# Altium PCB ppm_subs.PcbDoc
Units mil, origin at the board's own origin, x right, y up, seen from the top; angles counter-clockwise.
Board outline 813.03 x 1058.03 mil, 2 copper layers (Top Layer, Bottom Layer); 24 components, 31 nets, 125 pads, 19 vias.
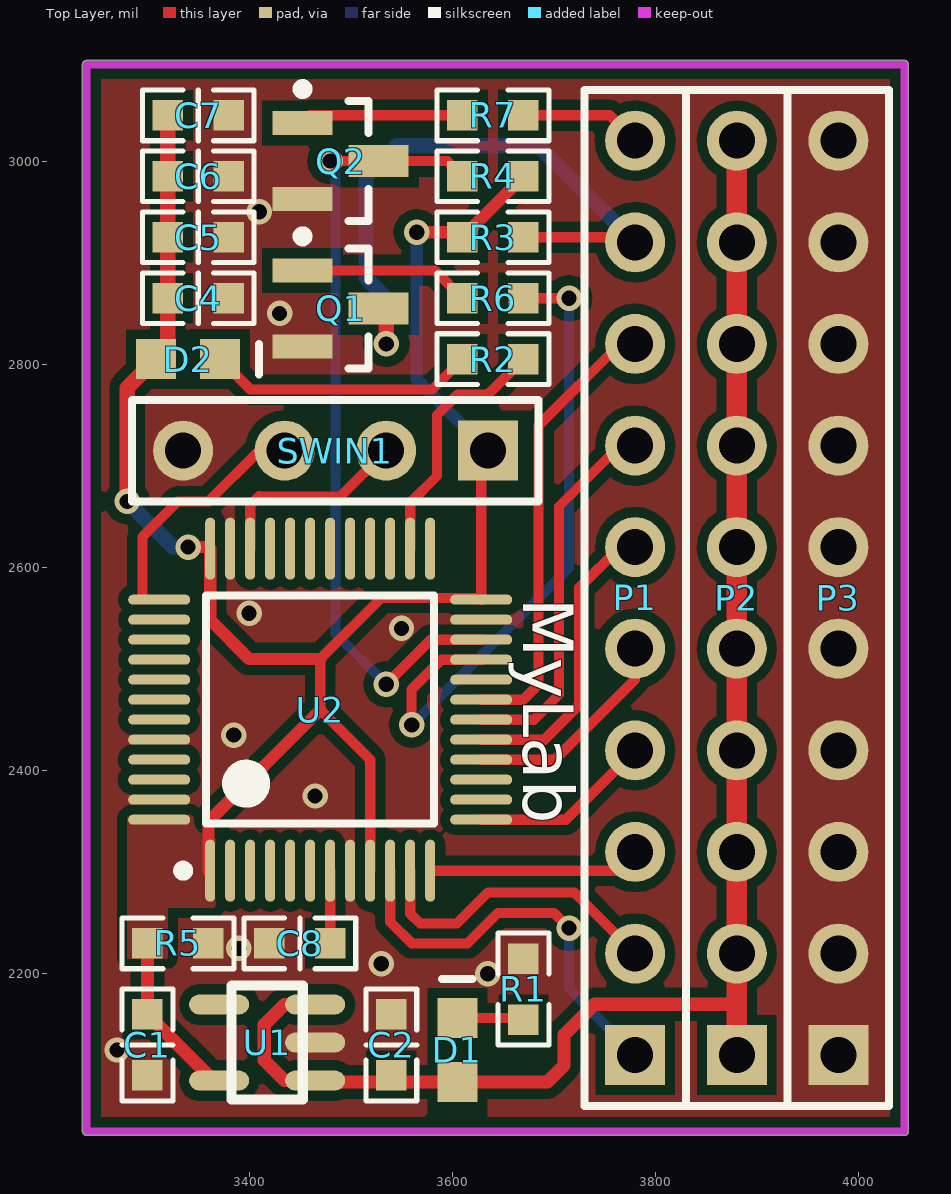
[diagram p0: Top Layer view]
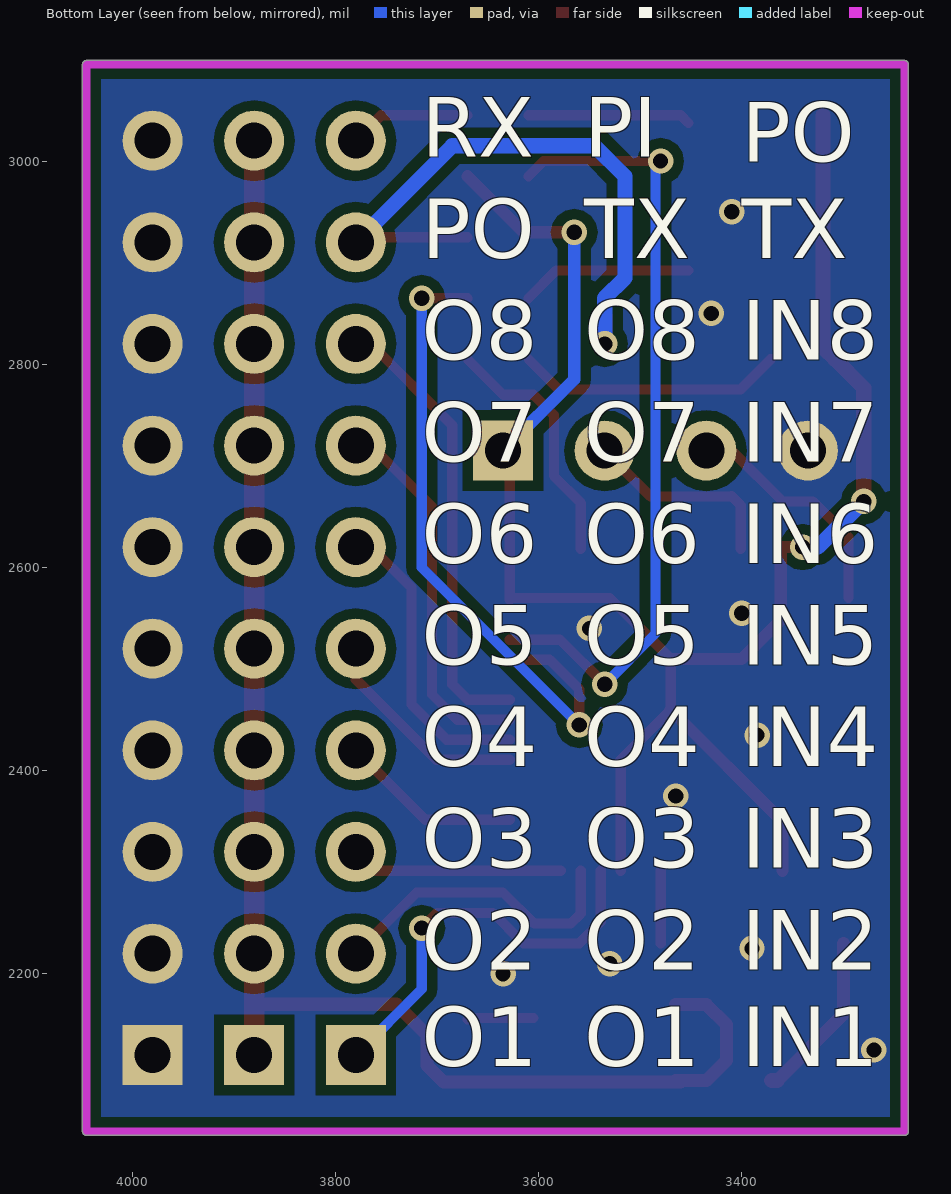
[diagram p1: Bottom Layer view, seen from below]

## Layer stack, top to bottom
Top Layer: signal copper 1.4
Dielectric: dielectric 12.6, FR-4, Dk 4.8
Bottom Layer: signal copper 1.4

## Board outline
3235.99,2045 ccw(c3240,2045) 3240,2040.98 4045,2040.98 ccw(c4045,2045) 4049.01,2045 4049.01,3095 ccw(c4045,3095) 4045,3099.01 3240,3099.01 ccw(c3240,3095) 3235.99,3095

## Design rules (kind name [scope] priority, off if disabled: settings)
Clearance [All] p1: gap=10
ComponentClearance [All] p1 off: gap=10 collisioncheckmode=3 verticalgap=10 showdistances=FALSE
Height [All] p1 off: minheight=0 maxheight=1000 prefheight=500
HoleSize [All] p1 off: absolutevalues=TRUE maxlimit=100 minlimit=1 maxpercent=80.000 minpercent=20.000
HoleToHoleClearance [All] p1 off: gap=10 allowstackedmicrovias=FALSE
LayerPairs [All] p1 off: enforce=TRUE
MinimumSolderMaskSliver [All] p1 off: minsoldermaskwidth=10
NetAntennae [All] p1 off: netantennaetolerance=0
PlaneConnect [All] p1: planeconnectstyle=Direct reliefexpansion=20 reliefentries=4 reliefconductorwidth=10 reliefairgap=10
PolygonConnect [All] p1: connectstyle=Direct reliefconductorwidth=10 reliefentries=4 polygonreliefangle="90 Angle"
RoutingCorners [All] p1: cornerstyle=Round minsetback=100 maxsetback=100
RoutingVias [All] p1: holewidth=25 width=25 viastyle="Through Hole" minholewidth=15 minwidth=25 maxholewidth=50 maxwidth=200
SilkToSilkClearance [All] p1 off: silktosilkclearance=10
SilkscreenOverComponentPads SilkToSolderMaskClearance [IsPad] p1 off: minsilkscreentomaskgap=10
SolderMaskExpansion [All] p1: expansion=4
TestPointUsage FabricationTestPointUsage [All] p1: valid=0 allowmultiple=FALSE
Testpoint FabricationTestpoint [All] p1: side=3 testpointundercomponent=TRUE minsize=40 maxsize=100 preferedsize=60 minholesize=0 maxholesize=40 preferedholesize=32 testpointgrid=1 style=297 order=0123456789
Width [All] p1: maxlimit=100 minlimit=8 preferedwidth=8
13 further rules are at their usual default settings.

## Components (designator, comment, footprint, x,y, rotation, side; value= is the part's Value field where it differs from the comment)
C1 "0.1uF" c_0603 3300,2130 r270 top
C2 "0.1uF" c_0603 3540,2130 r90 top
C4 "0.1uF" c_0603 3350,2865 r0 top
C5 "0.1uF" c_0603 3350,2925 r0 top
C6 "0.1uF" c_0603 3350,2985 r0 top
C7 "0.1uF" c_0603 3350,3045 r0 top
C8 "0.1uF" c_0603 3450,2230 r0 top
D1 "LED Gr" LED0603 3605,2125 r270 top
D2 "LED Gr" LED0603 3340,2805 r180 top
P1 "Header 10" HDR1X10 3780,2120 r90 top
P2 "Header 10" HDR1X10 3880,2120 r90 top
P3 "Header 10" HDR1X10 3980,2120 r90 top
Q1 "BSS123" SOT23-3N 3490,2855 r0 top
Q2 "BSS123" SOT23-3N 3490,3000 r0 top
R1 "1K" R_0603 3670,2185 r270 top
R2 "1K" R_0603 3640,2805 r180 top
R3 "1K" R_0603 3640,2925 r180 top
R4 "1K" R_0603 3640,2985 r0 top
R5 "1K" R_0603 3330,2230 r0 top
R6 "100R" R_0603 3640,2865 r180 top
R7 "100R" R_0603 3640,3045 r180 top
SWIN1 "Pad1X4_1.27_SWD" HDR1X4 3635,2715 r180 top
U1 "SPX3819M5" SOT-23-5 3465,2095 r180 top
U2 "STM32F103C8T6" LQFP48_L 3470,2460 r90 top

## Footprints (in the part's own frame and the unit in brackets; to place one, negate y for a bottom-side part, rotate by r counter-clockwise, add the part's x,y. Pads: shape width x height; smd on the part's side, far side on the other; paste and mask are expansions set on the pad)
c_0603 [mil]
  rect 30x30 smd: 1(-30,0) 2(30,0)
  silkscreen extent -55,-25 55,25
HDR1X4 [mm] "Connector; Header; 4 Position"
  rect 1.5x1.5 hole 0.9: 1(0,0)
  round 1.5 hole 0.9: 2(2.54,0) 3(5.08,0) 4(7.62,0)
  silkscreen extent -1.27,-1.27 8.89,1.27
HDR1X10 [mm] "Connector; Header; 10 Position"
  rect 1.5x1.5 hole 0.9: 1(0,0)
  round 1.5 hole 0.9: 2(2.54,0) 3(5.08,0) 4(7.62,0) 5(10.16,0) 6(12.7,0) 7(15.24,0) 8(17.78,0) 9(20.32,0) 10(22.86,0)
  silkscreen extent -1.27,-1.27 24.13,1.27
LED0603 [mm] "Chip LED, Body 1.6x0.8mm, IPC Medium Density"
  rect 1x1 smd: 1(-0.8,0) 2(0.8,0)
  silkscreen extent -1.78,-0.38 -1.78,0.38, body extent -0.82,-0.38 0.82,0.34, height 0.68
LQFP48_L [mm]
  oval 1.55x0.25 smd: 1(-4.025,2.75) 2(-4.025,2.25) 3(-4.025,1.75) 4(-4.025,1.25) 5(-4.025,0.75) 6(-4.025,0.25) 7(-4.025,-0.25) 8(-4.025,-0.75) 9(-4.025,-1.25) 10(-4.025,-1.75) 11(-4.025,-2.25) 12(-4.025,-2.75) 25(4.025,-2.75) 26(4.025,-2.25) 27(4.025,-1.75) 28(4.025,-1.25) 29(4.025,-0.75) 30(4.025,-0.25) 31(4.025,0.25) 32(4.025,0.75) 33(4.025,1.25) 34(4.025,1.75) 35(4.025,2.25) 36(4.025,2.75)
  oval 0.25x1.55 smd: 13(-2.75,-4.025) 14(-2.25,-4.025) 15(-1.75,-4.025) 16(-1.25,-4.025) 17(-0.75,-4.025) 18(-0.25,-4.025) 19(0.25,-4.025) 20(0.75,-4.025) 21(1.25,-4.025) 22(1.75,-4.025) 23(2.25,-4.025) 24(2.75,-4.025) 37(2.75,4.025) 38(2.25,4.025) 39(1.75,4.025) 40(1.25,4.025) 41(0.75,4.025) 42(0.25,4.025) 43(-0.25,4.025) 44(-0.75,4.025) 45(-1.25,4.025) 46(-1.75,4.025) 47(-2.25,4.025) 48(-2.75,4.025)
  silkscreen extent -4.15,-2.85 2.85,3.55
R_0603 [mil]
  rect 30x30 smd: 1(-30,0) 2(30,0)
  silkscreen extent -55,-25 55,25
SOT23-3N [mm] "SOT23, 3-Leads, Body 2.9x1.3mm, Pitch 0.95mm, Lead Span 2.5mm, IPC Medium Density"
  rect 1.5x0.6 smd: 1(-0.95,0.95) 2(-0.95,-0.95)
  rect 1.5x0.8 smd: 3(0.95,0)
  silkscreen extent -1.07,-1.5 0.7,1.92, body extent -1.21,-1.45 1.21,1.45, height 0.99
SOT-23-5 [mm]
  oval 1.5x0.5 smd: 1(0,0) 2(0,-0.95) 3(0,-1.9) 4(2.4,-1.9) 5(2.4,0)
  silkscreen extent 0.31,-2.38 2.09,0.48, body extent -0.2,-2.4 2.6,0.5, height 1.2

## Part data
C1 C2 C4 C5 C6 C7 C8: library part CAP, "Capacitor"
D1 D2: "Green"
P1 P2 P3: "Header, 10-Pin"
Q1 Q2: library part 2N7002, "N-channel Enhancement Mode Field-effect Transistor"
R1 R2 R3 R4 R5 R6 R7: library part Res, "Resistor"
SWIN1: "Header"
U1: "3.3V 500mA LDO Regulator"
U2: "STM32 ARM-based 32-bit MCU with 64 Kbytes Flash, 48-pin LQFP, Industrial Temperature"

## Via types
v1: diameter 25, hole 15, Top Layer to Bottom Layer, 19 vias

## Nets (pads, with @x,y where several pads share a name; then routed paths per layer and width w, separated by ;. In a path a pad name is that pad's centre, name@x,y a point inside that pad or via, vN(x,y) a via of type N, cw(c..) or ccw(c..) an arc to the next point about the centre after c; other vN are vias at no path point)
3V3: C1.1 C4.1 C5.1 C6.1 C7.1 D2.2 R3.2 R4.2 R5.1 SWIN1.1 U1.5 U2.1 U2.9 U2.24 U2.36 U2.48 | length 1986
  Top Layer w10: U2.9 3519.21,2410.79 3470,2460 3470,2510 3530,2570 3626.73,2570 U2.24 SWIN1.1@3628.46,2708.46
  Top Layer w12: v1(3340,2620) U2.36@3360.2,2620 ; U2.1@3360,2301.54 3360,2350 3470,2460 ; U2.36 3361.73,2548.27 3400,2510 3470,2510 ; v1(3565,2930) 3615,2930 R4.2
  Top Layer w13: R5.1 C1.1 U1.5@3365,2095
  Top Layer w15: v1(3280,2665) 3280,2776.5 D2.2 3320,2816.5 C4.1 C5.1 C6.1 C7.1 ; U1.5@3365,2095 U1.5
  Bottom Layer w12: v1(3565,2930) 3565,2785 SWIN1.1
  Bottom Layer w15: v1(3280,2665) 3325,2620 v1(3340,2620)
5V: C2.1 D1.2 P2.1 P2.2 P2.3 P2.4 P2.5 P2.6 P2.7 P2.8 P2.9 P2.10 U1.1 U1.3 | length 1520.7
  Top Layer w13: U1.1@3460,2093.5 D1.2 3693.5,2093.5 3710,2110 3710,2140 3740,2170 3880,2170 ; U1.1 3435,2095 3415,2115 3415,2150 3434.8,2169.8 U1.3
  Top Layer w20: P2.1 3880,2170 P2.2 P2.3 P2.4 P2.5 P2.6 P2.7 P2.8 P2.9 P2.10
GND: C1.2 C2.2 C4.2 C5.2 C6.2 C7.2 C8.1 P3.1 P3.2 P3.3 P3.4 P3.5 P3.6 P3.7 P3.8 P3.9 P3.10 Q1.2 Q2.2 R1.1 R5.2 SWIN1.4 U1.2 U2.8 U2.23 U2.35 U2.44 U2.47
  other v1: 3270,2125 3635,2200 3530,2210 3390,2225 3465,2375 3385,2435 3550,2540 3400,2555 3430,2850 3410,2950
JTCK: SWIN1.3 U2.37 | length 235.2
  Top Layer w10: U2.37@3295,2570 3295,2630 3330,2665 3360,2665 3410,2715 SWIN1.3
JTMS: SWIN1.2 U2.34 | length 198.9
  Top Layer w10: U2.34 3401.1,2661.1 3410,2670 ; 3410,2669.88 3490,2669.88 ; 3490,2670 SWIN1.2
LED: R2.1 U2.26 | length 250.3
  Top Layer w10: U2.26 3558.58,2663.58 3585,2690 3585,2750 3605,2770 3635,2770 R2.1
NetC8_2: C8.2 U2.7 | length 71.4
  Top Layer w10: C8.2@3479.84,2230.16 U2.7
NetD1_1: D1.1 R1.2 | length 65.6
  Top Layer w10: D1.1 3668.5,2156.5 R1.2
NetD2_1: D2.1 R2.2 | length 263.4
  Top Layer w10: D2.1 3401.5,2775 3580,2775 R2.2
NetQ1_1: Q1.1 R6.2 | length 168.8
  Top Layer w10: Q1.1 3582.6,2892.4 R6.2
NetQ2_1: Q2.1 R7.2 | length 160.5
  Top Layer w10: Q2.1 3460.2,3045 R7.2
SBUS_RX: P1.9 Q1.3 R3.1 | length 629.5
  Top Layer w10: R3.1 3775,2925 P1.9
  Top Layer w15: v1(3535,2820) Q1.3@3535,2847.4
  Bottom Layer w15: v1(3535,2820) 3535,2865 3515,2885 3515,2985 3545,3015 3685,3015 P1.9
SBUS_TX: P1.10 R7.1 | length 120.4
  Top Layer w10: R7.1 3755,3045 P1.10
TIM1_CH1: U2.29
TIM1_CH2: U2.30
TIM1_CH3: U2.31
TIM1_CH4: U2.32
TIM2_CH1: P1.1 U2.10 | length 405.8
  Top Layer w10: U2.10 3538.9,2251.1 3560,2230 3615,2230 3645,2260 3700,2260 v1(3715,2245)
  Bottom Layer w10: v1(3715,2245) 3715,2185 P1.1
TIM2_CH2: P1.2 U2.11 | length 305.1
  Top Layer w10: U2.11 3558.58,2259.26 3568.15,2249.68 3604.68,2249.68 3635,2280 3720,2280 P1.2
TIM2_CH3: P1.3 U2.12 | length 209.4
  Top Layer w10: U2.12 3761.54,2301.54 P1.3
TIM2_CH4: P1.4 U2.13 | length 179.8
  Top Layer w10: U2.13 3711.73,2351.73 P1.4
TIM3_CH1: P1.5 U2.16 | length 214.3
  Top Layer w10: U2.16 3700.79,2410.79 3780,2490 P1.5
TIM3_CH2: P1.6 U2.17 | length 282.4
  Top Layer w10: U2.17 3690.47,2430.47 3725,2465 3725,2580 P1.6@3765,2620
TIM3_CH3: P1.7 U2.18 | length 356.7
  Top Layer w10: U2.18 3680.16,2450.16 3705,2475 3705,2660 P1.7@3765,2720
TIM3_CH4: P1.8 U2.19 | length 430.9
  Top Layer w10: U2.19 3669.84,2469.84 3685,2485 3685,2740 P1.8@3765,2820
TIM4_CH1: U2.42
TIM4_CH2: U2.43
TIM4_CH3: U2.45
TIM4_CH4: U2.46
USART3_RX: Q2.3 R4.1 U2.22 | length 785.6
  Top Layer w10: v1(3480,3000) Q2.3 3595,3000 R4.1 ; v1(3535,2485) 3578.9,2528.9 U2.22
  Bottom Layer w10: v1(3480,3000) 3485,2995 3485,2535 v1(3535,2485)
USART3_TX: R6.1 U2.21 | length 644.8
  Top Layer w10: v1(3560,2445) 3560,2480 3589.21,2509.21 U2.21 ; R6.1 v1(3715,2865)
  Bottom Layer w10: v1(3560,2445) 3715,2600 v1(3715,2865)
pads on no net: U1.4 U2.2 U2.3 U2.4 U2.5 U2.6 U2.14 U2.15 U2.20 U2.25 U2.27 U2.28 U2.33 U2.38 U2.39 U2.40 U2.41

## Polygon pours and split planes (outlines as drawn)
GND on Top Layer "Top Layer-No Net" (solid, remove dead copper, pour order 1001): 3240,3095 4045,3095 4045,2045 3240,2045 3240,3095
3V3 on Top Layer "Top Layer-No Net" (solid, remove dead copper, pour order 1000): 3280,2360 3280,2215 3320,2215 3320,2265 3370,2265 3370,2360 3280,2360
GND on Bottom Layer "Top Layer-No Net" (solid, remove dead copper, pour order 1002): 3240,3095 4045,3095 4045,2045 3240,2045 3240,3095

## Keep-outs
Keep-Out Layer:
  lines w8: 3240,2045 4045,2045 4045,3095 3240,3095 3240,2045

## Silkscreen, mask and mechanical layers (free items; w line width, h text height)
Top Overlay:
  text "MyLab" at 3670,2570 h50 r270
Bottom Overlay:
  text "PI" at 3555,2985 h100
  text "RX" at 3715,2985 h100
  text "PO" at 3400,2980 h100
  text "TX" at 3400,2885 h100
  text "TX" at 3555,2885 h100
  text "PO" at 3715,2885 h100
  text "IN8" at 3400,2785 h100
  text "O8" at 3555,2785 h100
  text "O8" at 3715,2785 h100
  text "IN7" at 3400,2685 h100
  text "O7" at 3555,2685 h100
  text "O7" at 3715,2685 h100
  text "IN6" at 3400,2585 h100
  text "O6" at 3555,2585 h100
  text "O6" at 3715,2585 h100
  text "IN5" at 3400,2485 h100
  text "O5" at 3555,2485 h100
  text "O5" at 3715,2485 h100
  text "IN4" at 3400,2385 h100
  text "O4" at 3555,2385 h100
  text "O4" at 3715,2385 h100
  text "IN3" at 3400,2285 h100
  text "O3" at 3555,2285 h100
  text "O3" at 3715,2285 h100
  text "IN2" at 3400,2185 h100
  text "O2" at 3555,2185 h100
  text "O2" at 3715,2185 h100
  text "IN1" at 3400,2090 h100
  text "O1" at 3555,2090 h100
  text "O1" at 3715,2090 h100